# Altium PCB AX301_AX4010.PcbDoc (part 10 of 10)
Units mm, origin at the board's own origin, x right, y up, seen from the top; angles counter-clockwise.
Board outline 131.7 x 91.8 mm, 4 copper layers (Top Layer, GND, Mid-Layer 1, Bottom Layer); 191 components, 338 nets, 1108 pads, 420 vias.
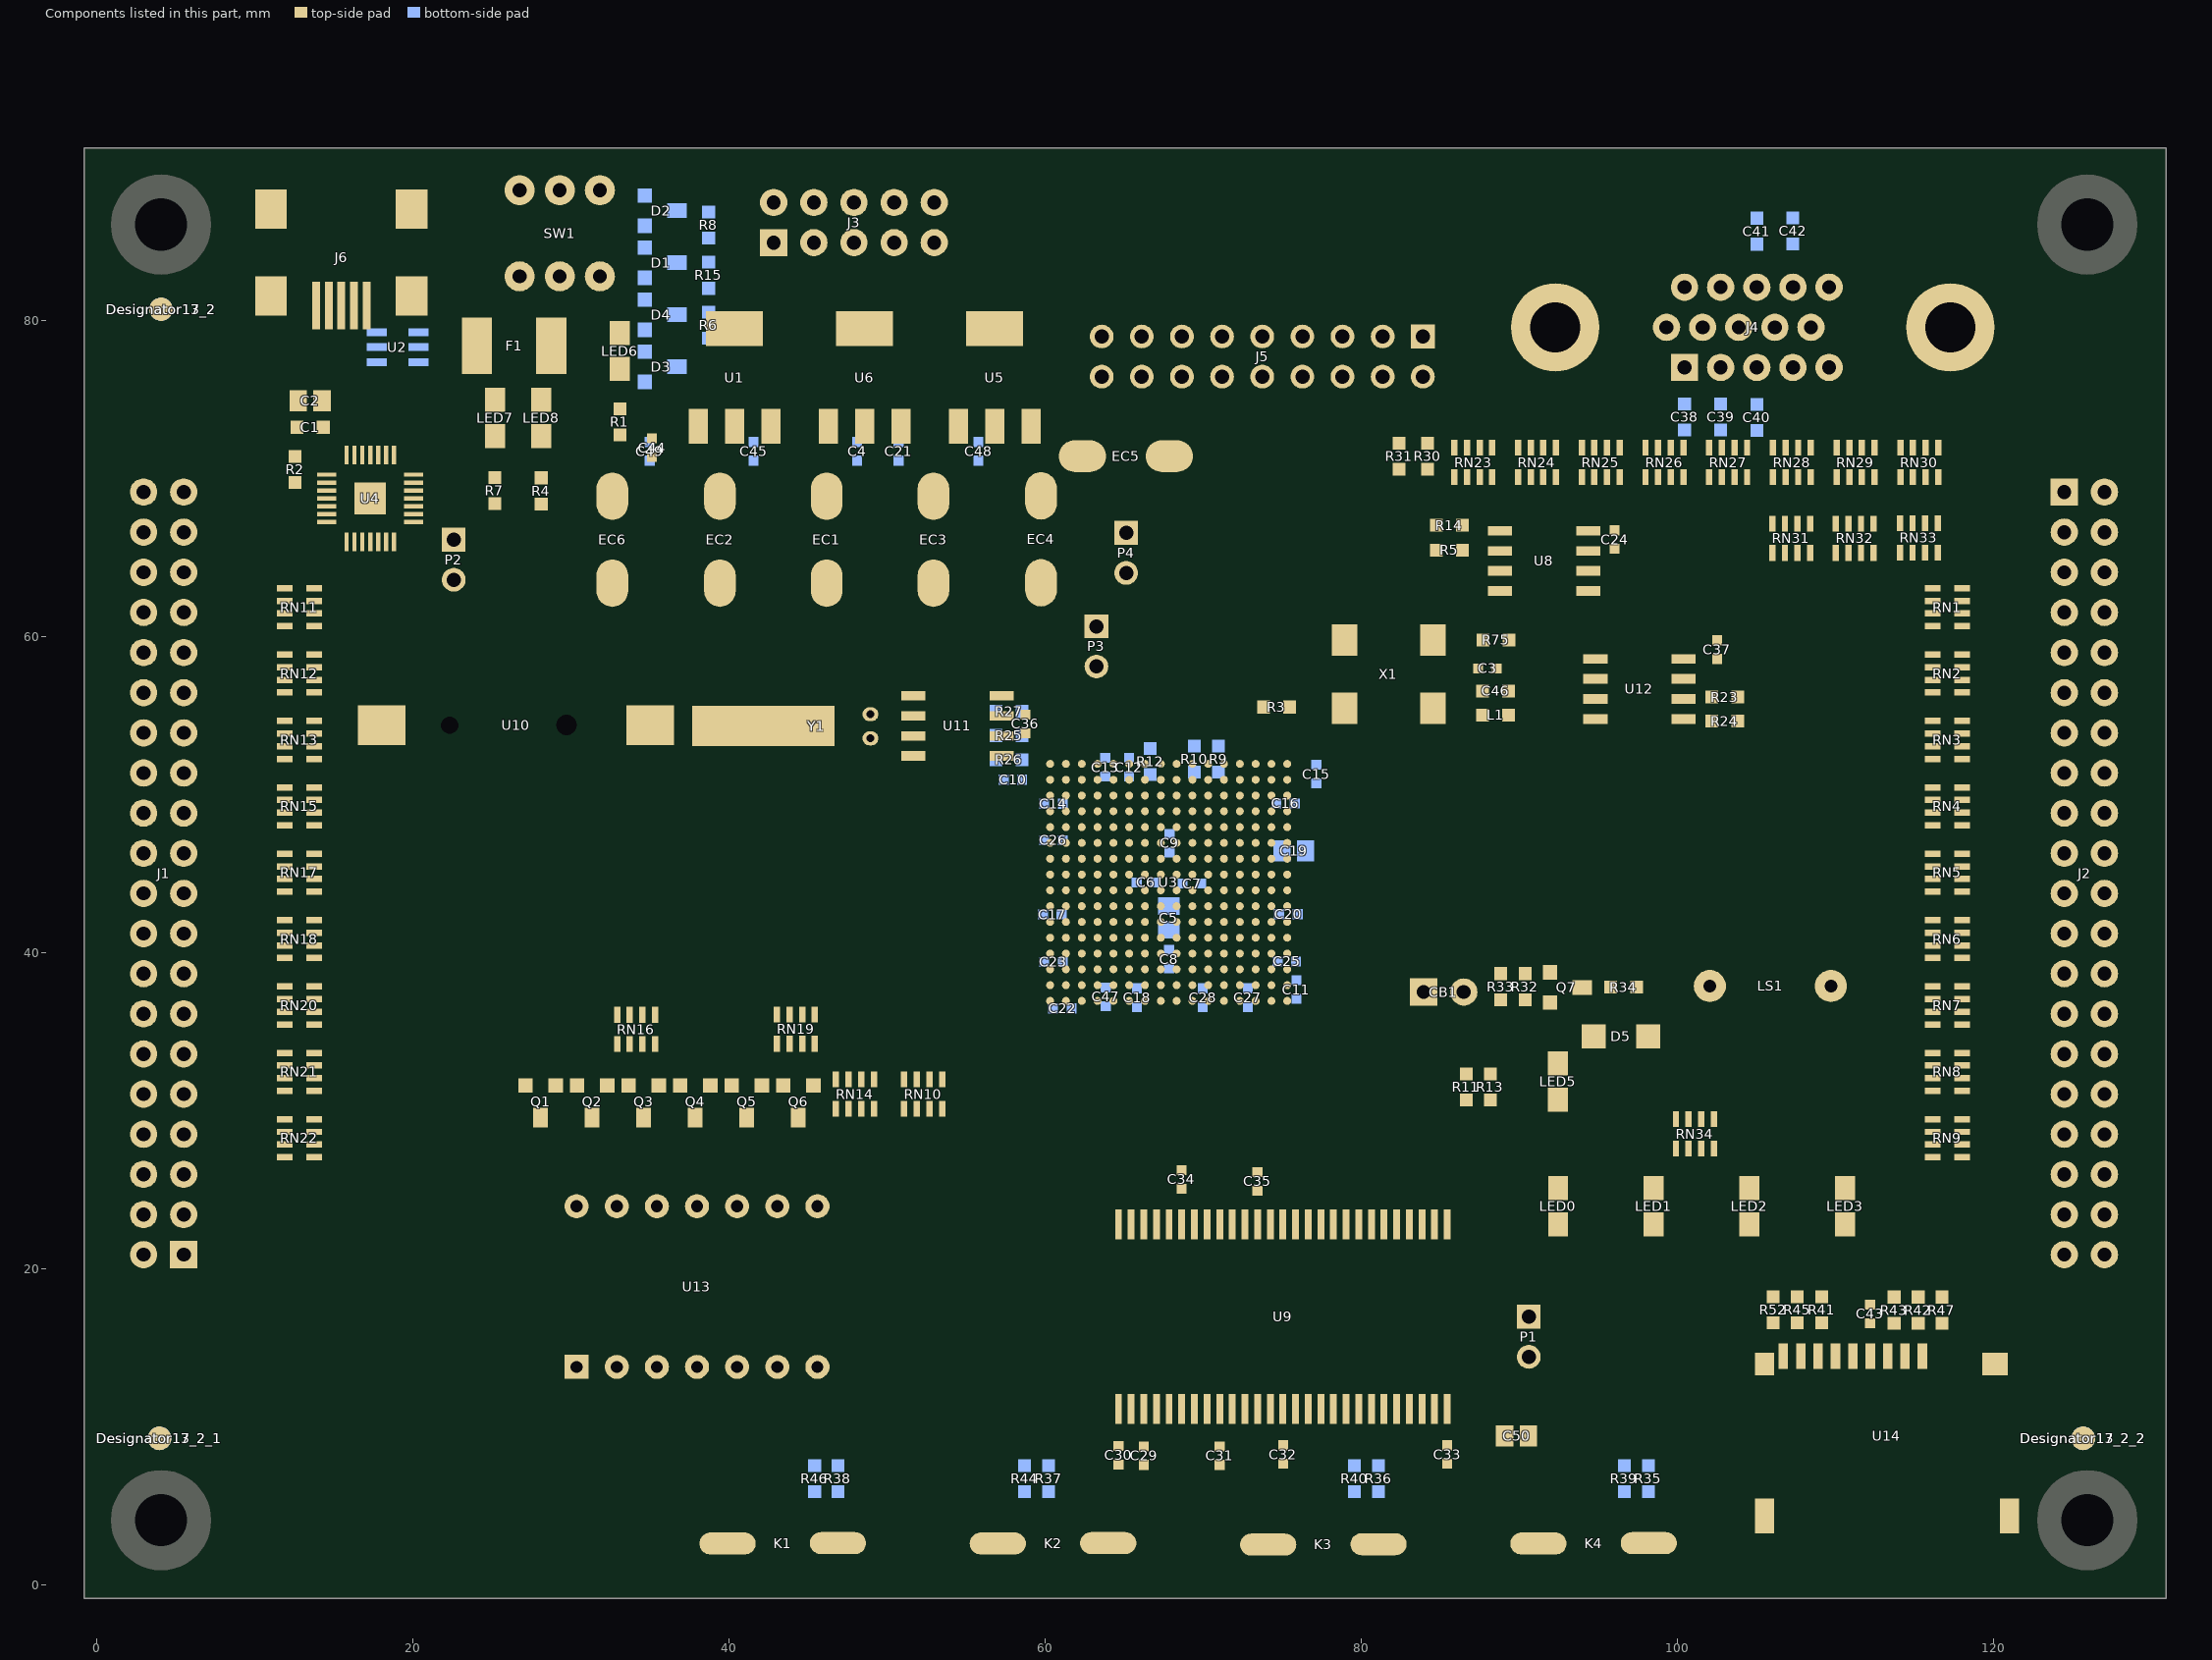
[diagram p12: the components of this part, seen from the top]

## Via types
v1: diameter 0.508, hole 0.254, Top Layer to Bottom Layer, 377 vias
v2: diameter 0.762, hole 0.381, Top Layer to Bottom Layer, 41 vias
v3: diameter 1.016, hole 0.508, Top Layer to Bottom Layer, 2 vias

## Nets (pads, with @x,y where several pads share a name; then routed paths per layer and width w, separated by ;. In a path a pad name is that pad's centre, name@x,y a point inside that pad or via, vN(x,y) a via of type N, cw(c..) or ccw(c..) an arc to the next point about the centre after c; other vN are vias at no path point) (continued)
copper on no net: (continued)
  Top Layer w0.017: 26.468,2.252 28.026,2.252 ; 26.485,2.268 28.042,2.268 ; 26.485,2.285 28.059,2.285 ; 26.485,2.301 28.075,2.301 ; 26.485,2.318 28.075,2.318 ; 26.485,2.334 28.092,2.334 ; 26.501,2.351 28.108,2.351 ; 26.501,2.367 28.125,2.367 ; 26.501,2.384 28.141,2.384 ; 26.501,2.4 28.158,2.4 ; 26.501,2.417 28.174,2.417 ; 26.518,2.433 28.191,2.433 ; 26.518,2.45 28.207,2.45 ; 26.518,2.466 28.224,2.466 ; 26.518,2.483 28.24,2.483 ; 26.534,2.499 28.257,2.499 ; 26.534,2.516 28.257,2.516 ; 26.534,2.532 28.273,2.532 ; 26.534,2.549 28.29,2.549 ; 26.534,2.565 28.306,2.565 ; 26.551,2.582 28.323,2.582 ; 26.551,2.598 28.339,2.598 ; 26.551,2.615 28.356,2.615 ; 26.551,2.631 28.372,2.631 ; 26.567,2.648 28.389,2.648 ; 26.567,2.664 28.405,2.664 ; 26.567,2.681 28.422,2.681 ; 26.567,2.697 28.422,2.697 ; 26.567,2.714 28.438,2.714 ; 26.584,2.73 28.455,2.73 ; 26.584,2.747 28.471,2.747 ; 26.584,2.764 28.488,2.764 ; 26.584,2.78 28.504,2.78 ; 26.584,2.797 28.521,2.797 ; 26.6,2.813 28.537,2.813 ; 26.6,2.83 28.554,2.83 ; 26.6,2.846 28.57,2.846 ; 26.6,2.863 28.587,2.863 ; 26.617,2.879 28.603,2.879 ; 26.617,2.896 28.603,2.896 ; 26.617,2.912 28.62,2.912 ; 26.617,2.929 28.636,2.929 ; 26.617,2.945 28.653,2.945 ; 26.633,2.962 28.669,2.962 ; 26.633,2.978 28.686,2.978 ; 26.633,2.995 28.702,2.995 ; 26.633,3.011 28.719,3.011 ; 26.633,3.028 28.735,3.028 ; 26.65,3.044 28.752,3.044 ; 26.65,3.061 28.768,3.061 ; 26.65,3.077 28.785,3.077 ; 26.65,3.094 28.785,3.094 ; 26.666,3.11 28.801,3.11 ; 26.666,3.127 28.818,3.127 ; 26.666,3.143 28.835,3.143 ; 26.666,3.16 28.851,3.16 ; 26.666,3.176 28.868,3.176 ; 26.683,3.193 28.884,3.193 ; 26.683,3.209 28.901,3.209 ; 26.683,3.226 28.917,3.226 ; 26.683,3.242 28.934,3.242 ; 26.683,3.259 28.95,3.259 ; 26.699,3.275 28.95,3.275 ; 26.699,3.292 28.967,3.292 ; 26.699,3.308 28.983,3.308 ; 26.699,3.325 29,3.325 ; 26.716,3.341 29.016,3.341 ; 26.716,3.358 29.033,3.358 ; 26.716,3.374 29.049,3.374 ; 26.716,3.391 29.066,3.391 ; 26.716,3.407 29.082,3.407 ; 26.732,3.424 29.099,3.424 ; 26.732,3.44 29.115,3.44 ; 26.732,3.457 29.132,3.457 ; 26.732,3.473 29.132,3.473 ; 26.732,3.49 29.148,3.49 ; 26.749,3.506 29.165,3.506 ; 26.749,3.523 29.181,3.523 ; 26.749,3.539 29.198,3.539 ; 26.749,3.556 29.214,3.556 ; 26.765,3.573 29.231,3.573 ; 26.765,3.589 29.247,3.589 ; 26.765,3.606 29.264,3.606 ; 26.765,3.622 29.28,3.622 ; 26.765,3.639 29.264,3.639 ; 26.782,3.655 29.264,3.655 ; 26.782,3.672 29.247,3.672 ; 26.782,3.688 29.231,3.688 ; 26.782,3.705 29.231,3.705 ; 26.782,3.721 29.214,3.721 ; 26.798,3.738 29.214,3.738 ; 26.798,3.754 29.198,3.754 ; 26.798,3.771 29.198,3.771 ; 26.798,3.787 29.181,3.787 ; 26.815,3.804 29.165,3.804 ; 26.815,3.82 29.165,3.82 ; 26.815,3.837 29.148,3.837 ; 26.815,3.853 29.148,3.853 ; 26.815,3.87 29.132,3.87 ; 26.831,3.886 29.132,3.886 ; 26.831,3.903 29.115,3.903 ; 26.831,3.919 29.115,3.919 ; 26.831,3.936 29.099,3.936 ; 26.848,3.952 29.082,3.952 ; 26.848,3.969 29.082,3.969 ; 26.848,3.985 29.066,3.985 ; 26.848,4.002 29.066,4.002 ; 26.848,4.018 29.049,4.018 ; 26.864,4.035 29.049,4.035 ; 26.864,4.051 29.033,4.051 ; 26.864,4.068 29.016,4.068 ; 26.864,4.084 29.016,4.084 ; 26.864,4.101 29,4.101 ; 26.881,4.117 29,4.117 ; 26.881,4.134 28.983,4.134 ; 26.881,4.15 28.983,4.15 ; 26.881,4.167 28.967,4.167 ; 26.897,4.183 28.95,4.183 ; 26.897,4.2 28.95,4.2 ; 26.897,4.216 28.934,4.216 ; 26.897,4.233 28.934,4.233 ; 26.897,4.249 28.917,4.249 ; 26.914,4.266 28.917,4.266 ; 26.914,4.282 28.901,4.282 ; 26.914,4.299 28.884,4.299 ; 26.914,4.315 28.884,4.315 ; 26.914,4.332 28.868,4.332 ; 26.93,4.348 28.868,4.348 ; 26.93,4.365 28.851,4.365 ; 26.93,4.381 28.851,4.381 ; 26.93,4.398 28.835,4.398 ; 26.947,4.415 28.818,4.415 ; 26.947,4.431 28.818,4.431 ; 26.947,4.448 28.801,4.448 ; 26.947,4.464 28.801,4.464 ; 26.947,4.481 28.785,4.481 ; 26.963,4.497 28.785,4.497 ; 26.963,4.514 28.768,4.514 ; 26.963,4.53 28.752,4.53 ; 26.963,4.547 28.752,4.547 ; 26.963,4.563 28.735,4.563 ; 26.98,4.58 28.735,4.58 ; 26.98,4.596 28.719,4.596 ; 26.98,4.613 28.719,4.613 ; 26.98,4.629 28.702,4.629 ; 26.996,4.646 28.702,4.646 ; 26.996,4.662 28.686,4.662 ; 26.996,4.679 28.669,4.679 ; 26.996,4.695 28.669,4.695 ; 26.996,4.712 28.653,4.712 ; 27.013,4.728 28.653,4.728 ; 27.013,4.745 28.636,4.745 ; 27.013,4.761 28.636,4.761 ; 27.013,4.778 28.62,4.778 ; 27.013,4.794 28.603,4.794 ; 27.029,4.811 28.603,4.811 ; 27.029,4.827 28.587,4.827 ; 27.029,4.844 28.587,4.844 ; 27.029,4.86 28.57,4.86 ; 27.046,4.877 28.57,4.877 ; 27.046,4.893 28.554,4.893 ; 27.046,4.91 28.537,4.91 ; 27.046,4.926 28.537,4.926 ; 27.046,4.943 28.521,4.943 ; 27.062,4.959 28.521,4.959 ; 27.062,4.976 28.504,4.976 ; 27.062,4.992 28.504,4.992 ; 27.062,5.009 28.488,5.009 ; 27.062,5.025 28.471,5.025 ; 27.079,5.042 28.471,5.042 ; 27.079,5.058 28.455,5.058 ; 27.079,5.075 28.455,5.075 ; 27.079,5.091 28.438,5.091 ; 27.095,5.108 28.438,5.108 ; 27.095,5.124 28.422,5.124 ; 27.095,5.141 28.405,5.141 ; 27.095,5.157 28.405,5.157 ; 27.095,5.174 28.389,5.174 ; 27.112,5.19 28.389,5.19 ; 27.112,5.207 28.372,5.207 ; 27.112,5.224 28.372,5.224 ; 27.112,5.24 28.356,5.24 ; 27.128,5.257 28.356,5.257 ; 27.128,5.273 28.339,5.273 ; 27.128,5.29 28.323,5.29 ; 27.128,5.306 28.323,5.306 ; 27.128,5.323 28.306,5.323 ; 27.145,5.339 28.306,5.339 ; 27.145,5.356 28.29,5.356 ; 27.145,5.372 28.29,5.372 ; 27.145,5.389 28.273,5.389 ; 27.145,5.405 28.257,5.405 ; 27.161,5.422 28.257,5.422 ; 27.161,5.438 28.24,5.438 ; 27.161,5.455 28.24,5.455 ; 27.161,5.471 28.224,5.471 ; 27.178,5.488 28.224,5.488 ; 27.178,5.504 28.207,5.504 ; 27.178,5.521 28.191,5.521 ; 27.178,5.537 28.191,5.537 ; 27.178,5.554 28.174,5.554 ; 27.195,5.57 28.174,5.57 ; 27.195,5.587 28.158,5.587 ; 27.195,5.603 28.158,5.603 ; 27.195,5.62 28.141,5.62 ; 27.195,5.636 28.125,5.636 ; 27.211,5.653 28.125,5.653 ; 27.211,5.669 28.108,5.669 ; 28.846,1.294 30.882,1.294 ; 28.846,1.311 30.865,1.311 ; 28.862,1.327 30.865,1.327 ; 28.879,1.344 30.849,1.344 ; 28.895,1.36 30.849,1.36 ; 28.912,1.377 30.832,1.377 ; 28.928,1.393 30.816,1.393 ; 28.945,1.41 30.816,1.41 ; 28.945,1.426 30.799,1.426 ; 28.961,1.443 30.799,1.443 ; 28.978,1.459 30.783,1.459 ; 28.994,1.476 30.783,1.476 ; 29.011,1.492 30.766,1.492 ; 29.027,1.509 30.766,1.509 ; 29.044,1.525 30.75,1.525 ; 29.044,1.542 30.75,1.542 ; 29.06,1.558 30.733,1.558 ; 29.077,1.575 30.733,1.575 ; 29.093,1.591 30.717,1.591 ; 29.11,1.608 30.717,1.608 ; 29.126,1.624 30.7,1.624 ; 29.143,1.641 30.7,1.641 ; 29.143,1.657 30.684,1.657 ; 29.159,1.674 30.684,1.674 ; 29.176,1.69 30.667,1.69 ; 29.192,1.707 30.667,1.707 ; 29.209,1.723 30.651,1.723 ; 29.225,1.74 30.651,1.74 ; 29.242,1.756 30.634,1.756 ; 29.242,1.773 30.634,1.773 ; 29.258,1.789 30.618,1.789 ; 29.275,1.806 30.601,1.806 ; 29.291,1.822 30.601,1.822 ; 29.308,1.839 30.585,1.839 ; 29.324,1.855 30.585,1.855 ; 29.324,3.589 29.66,3.589 ; 29.324,3.606 29.66,3.606 ; 29.324,3.622 29.66,3.622 ; 29.341,1.872 30.568,1.872 ; 29.341,1.888 30.568,1.888 ; 29.341,3.556 29.677,3.556 ; 29.341,3.573 29.677,3.573 ; 29.341,3.639 29.677,3.639 ; 29.357,1.905 30.552,1.905 ; 29.357,3.523 29.693,3.523 ; 29.357,3.539 29.693,3.539 ; 29.357,3.655 29.693,3.655 ; 29.374,1.922 30.552,1.922 ; 29.374,3.49 29.726,3.49 ; 29.374,3.506 29.71,3.506 ; 29.374,3.672 29.71,3.672 ; 29.39,1.938 30.535,1.938 ; 29.39,3.457 29.743,3.457 ; 29.39,3.473 29.726,3.473 ; 29.39,3.688 29.726,3.688 ; 29.407,1.955 30.535,1.955 ; 29.407,3.424 29.759,3.424 ; 29.407,3.44 29.743,3.44 ; 29.407,3.705 29.743,3.705 ; 29.423,1.971 30.519,1.971 ; 29.423,3.391 29.776,3.391 ; 29.423,3.407 29.759,3.407 ; 29.423,3.721 29.759,3.721 ; 29.44,1.988 30.519,1.988 ; 29.44,2.004 30.502,2.004 ; 29.44,3.374 29.776,3.374 ; 29.44,3.738 29.776,3.738 ; 29.456,2.021 30.502,2.021 ; 29.456,3.341 29.792,3.341 ; 29.456,3.358 29.792,3.358 ; 29.456,3.754 29.792,3.754 ; 29.473,2.037 30.486,2.037 ; 29.473,3.308 29.809,3.308 ; 29.473,3.325 29.809,3.325 ; 29.473,3.771 29.809,3.771 ; 29.489,2.054 30.486,2.054 ; 29.489,3.275 29.825,3.275 ; 29.489,3.292 29.825,3.292 ; 29.489,3.787 29.825,3.787 ; 29.506,2.07 30.469,2.07 ; 29.506,3.242 29.842,3.242 ; 29.506,3.259 29.842,3.259 ; 29.506,3.804 29.842,3.804 ; 29.522,2.087 30.469,2.087 ; 29.522,3.209 29.858,3.209 ; 29.522,3.226 29.858,3.226 ; 29.522,3.82 29.858,3.82 ; 29.539,2.103 30.452,2.103 ; 29.539,2.12 30.452,2.12 ; 29.539,3.176 29.891,3.176 ; 29.539,3.193 29.875,3.193 ; 29.539,3.837 29.875,3.837 ; 29.555,2.136 30.436,2.136 ; 29.555,3.143 29.908,3.143 ; 29.555,3.16 29.891,3.16 ; 29.555,3.853 29.891,3.853 ; 29.555,5.653 31.559,5.653 ; 29.555,5.669 31.575,5.669 ; 29.572,2.153 30.436,2.153 ; 29.572,3.11 29.924,3.11 ; 29.572,3.127 29.908,3.127 ; 29.572,3.87 29.908,3.87 ; 29.572,5.62 31.526,5.62 ; 29.572,5.636 31.542,5.636 ; 29.588,2.169 30.419,2.169 ; 29.588,3.077 29.941,3.077 ; 29.588,3.094 29.924,3.094 ; 29.588,3.886 29.924,3.886 ; 29.588,5.587 31.493,5.587 ; 29.588,5.603 31.509,5.603 ; 29.605,2.186 30.419,2.186 ; 29.605,3.061 29.941,3.061 ; 29.605,3.903 29.941,3.903 ; 29.605,5.554 31.476,5.554 ; 29.605,5.57 31.476,5.57 ; 29.621,2.202 30.403,2.202 ; 29.621,3.028 29.957,3.028 ; 29.621,3.044 29.957,3.044 ; 29.621,3.919 29.957,3.919 ; 29.621,5.521 31.443,5.521 ; 29.621,5.537 31.46,5.537 ; 29.638,2.219 30.386,2.219 ; 29.638,2.235 30.386,2.235 ; 29.638,2.995 29.974,2.995 ; 29.638,3.011 29.974,3.011 ; 29.638,3.936 29.974,3.936 ; 29.638,5.488 31.41,5.488 ; 29.638,5.504 31.427,5.504 ; 29.654,2.252 30.37,2.252 ; 29.654,2.962 29.99,2.962 ; 29.654,2.978 29.99,2.978 ; 29.654,3.952 29.99,3.952 ; 29.654,5.455 31.377,5.455 ; 29.654,5.471 31.394,5.471 ; 29.671,2.268 30.37,2.268 ; 29.671,2.929 30.007,2.929 ; 29.671,2.945 30.007,2.945 ; 29.671,3.969 30.007,3.969 ; 29.671,5.422 31.361,5.422 ; 29.671,5.438 31.361,5.438 ; 29.688,2.285 30.353,2.285 ; 29.688,2.896 30.023,2.896 ; 29.688,2.912 30.023,2.912 ; 29.688,3.985 30.023,3.985 ; 29.688,5.389 31.328,5.389 ; 29.688,5.405 31.344,5.405 ; 29.704,2.301 30.353,2.301 ; 29.704,2.863 30.056,2.863 ; 29.704,2.879 30.04,2.879 ; 29.704,4.002 30.04,4.002 ; 29.704,5.356 31.294,5.356 ; 29.704,5.372 31.311,5.372 ; 29.721,2.318 30.337,2.318 ; 29.721,2.83 30.073,2.83 ; 29.721,2.846 30.056,2.846 ; 29.721,4.018 30.056,4.018 ; 29.721,5.323 31.261,5.323 ; 29.721,5.339 31.278,5.339 ; 29.737,2.334 30.337,2.334 ; 29.737,2.351 30.32,2.351 ; 29.737,2.797 30.089,2.797 ; 29.737,2.813 30.073,2.813 ; 29.737,4.035 30.073,4.035 ; 29.737,5.29 31.245,5.29 ; 29.737,5.306 31.245,5.306 ; 29.754,2.367 30.32,2.367 ; 29.754,2.764 30.106,2.764 ; 29.754,2.78 30.089,2.78 ; 29.754,4.051 30.089,4.051 ; 29.754,5.257 31.212,5.257 ; 29.754,5.273 31.228,5.273 ; 29.77,2.384 30.304,2.384 ; 29.77,2.747 30.106,2.747 ; 29.77,4.068 30.106,4.068 ; 29.77,5.224 31.179,5.224 ; 29.77,5.24 31.195,5.24 ; 29.787,2.4 30.304,2.4 ; 29.787,2.714 30.122,2.714 ; 29.787,2.73 30.122,2.73 ; 29.787,4.084 30.122,4.084 ; 29.787,5.207 31.162,5.207 ; 29.803,2.417 30.287,2.417 ; 29.803,2.681 30.139,2.681 ; 29.803,2.697 30.139,2.697 ; 29.803,4.101 30.139,4.101 ; 29.803,5.174 31.129,5.174 ; 29.803,5.19 31.146,5.19 ; 29.82,2.433 30.287,2.433 ; 29.82,2.648 30.155,2.648 ; 29.82,2.664 30.155,2.664 ; 29.82,4.117 30.155,4.117 ; 29.82,5.141 31.113,5.141 ; 29.82,5.157 31.113,5.157 ; 29.836,2.45 30.271,2.45 ; 29.836,2.466 30.271,2.466 ; 29.836,2.615 30.172,2.615 ; 29.836,2.631 30.172,2.631 ; 29.836,4.134 30.172,4.134 ; 29.836,5.108 31.08,5.108 ; 29.836,5.124 31.096,5.124 ; 29.853,2.483 30.254,2.483 ; 29.853,2.582 30.205,2.582 ; 29.853,2.598 30.188,2.598 ; 29.853,4.15 30.188,4.15 ; 29.853,5.075 31.047,5.075 ; 29.853,5.091 31.063,5.091 ; 29.869,2.499 30.254,2.499 ; 29.869,2.549 30.221,2.549 ; 29.869,2.565 30.205,2.565 ; 29.869,4.167 30.205,4.167 ; 29.869,5.042 31.014,5.042 ; 29.869,5.058 31.03,5.058 ; 29.886,2.516 30.221,2.516 ; 29.886,2.532 30.221,2.532 ; 29.886,4.183 30.221,4.183 ; 29.886,5.009 30.997,5.009 ; 29.886,5.025 30.997,5.025 ; 29.902,4.2 30.238,4.2 ; 29.902,4.976 30.964,4.976 ; 29.902,4.992 30.981,4.992 ; 29.919,4.216 30.254,4.216 ; 29.919,4.943 30.931,4.943 ; 29.919,4.959 30.948,4.959 ; 29.935,4.233 30.271,4.233 ; 29.935,4.91 30.898,4.91 ; 29.935,4.926 30.915,4.926 ; 29.952,4.249 30.287,4.249 ; 29.952,4.877 30.882,4.877 ; 29.952,4.893 30.882,4.893 ; 29.968,4.266 30.304,4.266 ; 29.968,4.844 30.849,4.844 ; 29.968,4.86 30.865,4.86 ; 29.985,4.282 30.32,4.282 ; 29.985,4.811 30.816,4.811 ; 29.985,4.827 30.832,4.827 ; 30.001,4.299 30.337,4.299 ; 30.001,4.778 30.783,4.778 ; 30.001,4.794 30.799,4.794 ; 30.018,4.315 30.37,4.315 ; 30.018,4.745 30.75,4.745 ; 30.018,4.761 30.766,4.761 ; 30.034,4.332 30.386,4.332 ; 30.034,4.728 30.75,4.728 ; 30.051,4.348 30.403,4.348 ; 30.051,4.695 30.717,4.695 ; 30.051,4.712 30.733,4.712 ; 30.067,4.365 30.419,4.365 ; 30.067,4.662 30.684,4.662 ; 30.067,4.679 30.7,4.679 ; 30.084,4.381 30.436,4.381 ; 30.084,4.629 30.651,4.629 ; 30.084,4.646 30.667,4.646 ; 30.1,4.398 30.452,4.398 ; 30.1,4.596 30.634,4.596 ; 30.1,4.613 30.634,4.613 ; 30.117,4.415 30.469,4.415 ; 30.117,4.563 30.601,4.563 ; 30.117,4.58 30.618,4.58 ; 30.133,4.431 30.486,4.431 ; 30.133,4.53 30.568,4.53 ; 30.133,4.547 30.585,4.547 ; 30.15,4.448 30.502,4.448 ; 30.15,4.497 30.535,4.497 ; 30.15,4.514 30.552,4.514 ; 30.166,4.464 30.519,4.464 ; 30.166,4.481 30.519,4.481 ; 31.157,3.407 33.854,3.407 ; 31.157,3.424 33.854,3.424 ; 31.157,3.44 33.854,3.44 ; 31.173,3.391 33.854,3.391 ; 31.173,3.457 33.854,3.457 ; 31.19,3.358 33.854,3.358 ; 31.19,3.374 33.854,3.374 ; 31.19,3.473 33.854,3.473 ; 31.206,3.325 33.854,3.325 ; 31.206,3.341 33.854,3.341 ; 31.206,3.49 33.854,3.49 ; 31.223,3.292 33.854,3.292 ; 31.223,3.308 33.854,3.308 ; 31.223,3.506 33.854,3.506 ; 31.239,3.259 33.854,3.259 ; 31.239,3.275 33.854,3.275 ; 31.239,3.523 33.854,3.523 ; 31.256,3.226 33.854,3.226 ; 31.256,3.242 33.854,3.242 ; 31.256,3.539 33.854,3.539 ; 31.272,3.193 33.854,3.193 ; 31.272,3.209 33.854,3.209 ; 31.272,3.556 33.854,3.556 ; 31.289,3.176 33.854,3.176 ; 31.289,3.573 33.854,3.573 ; 31.305,3.143 33.854,3.143 ; 31.305,3.16 33.854,3.16 ; 31.305,3.589 33.854,3.589 ; 31.322,3.11 33.854,3.11 ; 31.322,3.127 33.854,3.127 ; 31.322,3.606 33.854,3.606 ; 31.339,3.077 33.854,3.077 ; 31.339,3.094 33.854,3.094 ; 31.339,3.622 33.854,3.622 ; 31.355,3.044 33.854,3.044 ; 31.355,3.061 33.854,3.061 ; 31.355,3.639 33.854,3.639 ; 31.372,3.011 33.854,3.011 ; 31.372,3.028 33.854,3.028 ; 31.372,3.655 33.854,3.655 ; 31.372,3.672 33.854,3.672 ; 31.388,2.978 33.854,2.978 ; 31.388,2.995 33.854,2.995 ; 31.388,3.688 33.854,3.688 ; 31.405,2.945 33.854,2.945 ; 31.405,2.962 33.854,2.962 ; 31.405,3.705 33.854,3.705 ; 31.421,2.929 33.854,2.929 ; 31.421,3.721 33.854,3.721 ; 31.438,2.896 33.854,2.896 ; 31.438,2.912 33.854,2.912 ; 31.438,3.738 33.854,3.738 ; 31.454,2.863 33.854,2.863 ; 31.454,2.879 33.854,2.879 ; 31.454,3.754 33.854,3.754 ; 31.471,2.83 33.854,2.83 ; 31.471,2.846 33.854,2.846 ; 31.471,3.771 33.854,3.771 ; 31.487,2.797 33.854,2.797 ; 31.487,2.813 33.854,2.813 ; 31.487,3.787 33.854,3.787 ; 31.504,2.764 33.854,2.764 ; 31.504,2.78 33.854,2.78 ; 31.504,3.804 33.854,3.804 ; 31.52,2.73 33.854,2.73 ; 31.52,2.747 33.854,2.747 ; 31.52,3.82 33.854,3.82 ; 31.537,2.714 33.854,2.714 ; 31.537,3.837 33.854,3.837 ; 31.553,2.681 33.854,2.681 ; 31.553,2.697 33.854,2.697 ; 31.553,3.853 33.854,3.853 ; 31.57,2.648 33.854,2.648 ; 31.57,2.664 33.854,2.664 ; 31.57,3.87 33.854,3.87 ; 31.57,3.886 33.854,3.886 ; 31.586,2.615 33.854,2.615 ; 31.586,2.631 33.854,2.631 ; 31.586,3.903 33.854,3.903 ; 31.603,2.582 33.854,2.582 ; 31.603,2.598 33.854,2.598 ; 31.603,3.919 33.854,3.919 ; 31.619,2.549 33.854,2.549 ; 31.619,2.565 33.854,2.565 ; 31.619,3.936 33.854,3.936 ; 31.636,2.516 33.854,2.516 ; 31.636,2.532 33.854,2.532 ; 31.636,3.952 33.854,3.952 ; 31.652,2.499 33.854,2.499 ; 31.652,3.969 33.854,3.969 ; 31.669,2.466 33.854,2.466 ; 31.669,2.483 33.854,2.483 ; 31.669,3.985 33.854,3.985 ; 31.685,2.433 33.854,2.433 ; 31.685,2.45 33.854,2.45 ; 31.685,4.002 33.854,4.002 ; 31.702,2.4 33.854,2.4 ; 31.702,2.417 33.854,2.417 ; 31.702,4.018 33.854,4.018 ; 31.718,2.367 33.854,2.367 ; 31.718,2.384 33.854,2.384 ; 31.718,4.035 33.854,4.035 ; 31.735,2.334 33.854,2.334 ; 31.735,2.351 33.854,2.351 ; 31.735,4.051 33.854,4.051 ; 31.751,2.301 33.854,2.301 ; 31.751,2.318 33.854,2.318 ; 31.751,4.068 33.854,4.068 ; 31.768,2.268 33.854,2.268 ; 31.768,2.285 33.854,2.285 ; 31.768,4.084 33.854,4.084 ; 31.784,2.252 33.854,2.252 ; 31.784,4.101 33.854,4.101 ; 31.784,4.117 33.854,4.117 ; 31.801,2.219 33.854,2.219 ; 31.801,2.235 33.854,2.235 ; 31.801,4.134 33.854,4.134 ; 31.817,2.186 33.854,2.186 ; 31.817,2.202 33.854,2.202 ; 31.817,4.15 33.854,4.15 ; 31.834,2.153 33.854,2.153 ; 31.834,2.169 33.854,2.169 ; 31.834,4.167 33.854,4.167 ; 31.85,2.12 33.854,2.12 ; 31.85,2.136 33.854,2.136 ; 31.85,4.183 33.854,4.183 ; 31.867,2.087 33.854,2.087 ; 31.867,2.103 33.854,2.103 ; 31.867,4.2 33.854,4.2 ; 31.883,2.054 33.854,2.054 ; 31.883,2.07 33.854,2.07 ; 31.883,4.216 33.854,4.216 ; 31.9,2.037 33.854,2.037 ; 31.9,4.233 33.854,4.233 ; 31.916,2.004 33.854,2.004 ; 31.916,2.021 33.854,2.021 ; 31.916,4.249 33.854,4.249 ; 31.933,1.971 33.854,1.971 ; 31.933,1.988 33.854,1.988 ; 31.933,4.266 33.854,4.266 ; 31.949,1.938 33.854,1.938 ; 31.949,1.955 33.854,1.955 ; 31.949,4.282 33.854,4.282 ; 31.966,1.905 33.854,1.905 ; 31.966,1.922 33.854,1.922 ; 31.966,4.299 33.854,4.299 ; 31.982,1.872 33.854,1.872 ; 31.982,1.888 33.854,1.888 ; 31.982,4.315 33.854,4.315 ; 31.982,4.332 33.854,4.332 ; 31.999,1.839 33.854,1.839 ; 31.999,1.855 33.854,1.855 ; 31.999,4.348 33.854,4.348 ; 32.015,1.806 33.854,1.806 ; 32.015,1.822 33.854,1.822 ; 32.015,4.365 33.854,4.365 ; 32.032,1.789 33.854,1.789 ; 32.032,4.381 33.854,4.381 ; 32.048,1.756 33.854,1.756 ; 32.048,1.773 33.854,1.773 ; 32.048,4.398 33.854,4.398 ; 32.065,1.723 33.854,1.723 ; 32.065,1.74 33.854,1.74 ; 32.065,4.415 33.854,4.415 ; 32.081,1.69 33.854,1.69 ; 32.081,1.707 33.854,1.707 ; 32.081,4.431 33.854,4.431 ; 32.098,1.657 33.854,1.657 ; 32.098,1.674 33.854,1.674 ; 32.098,4.448 33.854,4.448 ; 32.114,1.624 33.854,1.624 ; 32.114,1.641 33.854,1.641 ; 32.114,4.464 33.854,4.464 ; 32.131,1.591 33.854,1.591 ; 32.131,1.608 33.854,1.608 ; 32.131,4.481 33.854,4.481 ; 32.148,1.575 33.854,1.575 ; 32.148,4.497 33.854,4.497 ; 32.164,1.542 33.854,1.542 ; 32.164,1.558 33.854,1.558 ; 32.164,4.514 33.854,4.514 ; 32.181,1.509 33.854,1.509 ; 32.181,1.525 33.854,1.525 ; 32.181,4.53 33.854,4.53 ; 32.197,1.476 33.854,1.476 ; 32.197,1.492 33.854,1.492 ; 32.197,4.547 33.854,4.547 ; 32.197,4.563 33.854,4.563 ; 32.214,1.443 33.854,1.443 ; 32.214,1.459 33.854,1.459 ; 32.214,4.58 33.854,4.58 ; 32.23,1.41 33.854,1.41 ; 32.23,1.426 33.854,1.426 ; 32.23,4.596 33.854,4.596 ; 32.247,1.377 33.854,1.377 ; 32.247,1.393 33.854,1.393 ; 32.247,4.613 33.854,4.613 ; 32.263,1.36 33.854,1.36 ; 32.263,4.629 33.854,4.629 ; 32.28,1.327 33.854,1.327 ; 32.28,1.344 33.854,1.344 ; 32.28,4.646 33.854,4.646 ; 32.296,1.294 33.854,1.294 ; 32.296,1.311 33.854,1.311 ; 32.296,4.662 33.854,4.662 ; 32.313,4.679 33.854,4.679 ; 32.329,4.695 33.854,4.695 ; 32.346,4.712 33.854,4.712 ; 32.362,4.728 33.854,4.728 ; 32.379,4.745 33.854,4.745 ; 32.395,4.761 33.854,4.761 ; 32.395,4.778 33.854,4.778 ; 32.412,4.794 33.854,4.794 ; 32.428,4.811 33.854,4.811 ; 32.445,4.827 33.854,4.827 ; 32.461,4.844 33.854,4.844 ; 32.478,4.86 33.854,4.86 ; 32.494,4.877 33.854,4.877 ; 32.511,4.893 33.854,4.893 ; 32.527,4.91 33.854,4.91 ; 32.544,4.926 33.854,4.926 ; 32.56,4.943 33.854,4.943 ; 32.577,4.959 33.854,4.959 ; 32.593,4.976 33.854,4.976 ; 32.593,4.992 33.854,4.992 ; 32.61,5.009 33.854,5.009 ; 32.626,5.025 33.854,5.025 ; 32.643,5.042 33.854,5.042 ; 32.659,5.058 33.854,5.058 ; 32.676,5.075 33.854,5.075 ; 32.692,5.091 33.854,5.091 ; 32.709,5.108 33.854,5.108 ; 32.725,5.124 33.854,5.124 ; 32.742,5.141 33.854,5.141 ; 32.758,5.157 33.854,5.157 ; 32.775,5.174 33.854,5.174 ; 32.791,5.19 33.854,5.19 ; 32.808,5.207 33.854,5.207 ; 32.808,5.224 33.854,5.224 ; 32.824,5.24 33.854,5.24 ; 32.841,5.257 33.854,5.257 ; 32.857,5.273 33.854,5.273 ; 32.874,5.29 33.854,5.29 ; 32.89,5.306 33.854,5.306 ; 32.907,5.323 33.854,5.323 ; 32.923,5.339 33.854,5.339 ; 32.94,5.356 33.854,5.356 ; 32.956,5.372 33.854,5.372 ; 32.973,5.389 33.854,5.389 ; 32.99,5.405 33.854,5.405 ; 33.006,5.422 33.854,5.422 ; 33.006,5.438 33.854,5.438 ; 33.023,5.455 33.854,5.455 ; 33.039,5.471 33.854,5.471 ; 33.056,5.488 33.854,5.488 ; 33.072,5.504 33.854,5.504 ; 33.089,5.521 33.854,5.521 ; 33.105,5.537 33.854,5.537 ; 33.122,5.554 33.854,5.554 ; 33.138,5.57 33.854,5.57 ; 33.155,5.587 33.854,5.587 ; 33.171,5.603 33.854,5.603 ; 33.188,5.62 33.854,5.62 ; 33.204,5.636 33.854,5.636 ; 33.221,5.653 33.854,5.653 ; 33.221,5.669 33.854,5.669

## Polygon pours and split planes (outlines as drawn)
D1V2 on Bottom Layer "Bottom Layer-No Net" (solid, pour order 7): 62.312,49.962 73.33,49.962 73.33,48.603 73.33,38.887 62.205,38.887 62.312,38.887 62.312,49.962
GND on Bottom Layer "Bottom Layer-No Net" (hatched 45Degree grid 0.508 track 0.127, remove dead copper, pour order 4): -0.787,91.034 130.785,91.034 130.785,-0.66 131.191,-1.067 -0.787,-1.067 -0.787,91.034 -0.889,91.135
GND on GND (split plane): 130.401,82.354 130.401,-0.371 -0.277,-0.371 -0.277,90.404 130.401,90.404
D2V5 on GND (split plane): 49.287,45.872 49.292,45.848 49.306,45.827 49.327,45.813 49.352,45.808 64.338,45.808 64.363,45.813 64.384,45.827 64.398,45.848 64.403,45.872 64.403,48.83 66.229,48.83 66.229,41.91 66.234,41.885 66.248,41.864 66.269,41.85 66.294,41.845 71.233,41.845 71.233,39.984 64.403,39.984 64.403,42.977 64.398,43.002 64.384,43.023 64.363,43.037 64.338,43.042 46.902,43.042 46.902,70.471 49.287,70.471

## Keep-outs
Keep-Out Layer:
  lines w0.203: 0,3.074 0,86.926 cw(c3.066,86.926) 3.066,89.992 ; 0.007,3.074 ccw(c3.073,3.074) 3.073,0.008 ; 2.972,0 126.931,0 ccw(c126.931,3.066) 129.997,3.066 ; 3.074,90 126.931,90 ; 126.931,89.992 cw(c126.931,86.926) 129.997,86.926 ; 130,2.979 130,86.926

## Other copper
Top Layer:
  rectangle net D3V3: 93.574,65.126 95.148,68.478
  rectangle net GND: 88.011,61.773 89.535,63.17
  rectangle net D3V3: 60.858,71.247 63.856,74.32
  rectangle net D3V3: 58.496,71.171 63.856,74.397
  rectangle net D1V2: 56.185,67.132 60.833,70.51
  rectangle net D1V2: 56.185,67.132 57.607,79.451
  rectangle net VCC: 50.292,67.259 54.051,70.46
  rectangle net VCC: 50.216,67.285 51.511,74.422
  rectangle net D2V5: 45.11,67.31 48.641,70.46
  rectangle net D2V5: 47.752,67.285 49.225,79.019
  rectangle net VCC: 38.405,67.259 43.282,70.383
  rectangle net VCC: 42.037,67.564 43.282,74.371
  rectangle net D3V3: 31.547,67.259 37.338,71.73
  rectangle net D3V3: 36.322,70.815 40.97,71.73
  rectangle net VCC: 13.945,70.079 15.164,72.136
  rectangle net GND: 16.535,53.137 19.507,57.81
  rectangle net VCC: 13.995,70.891 15.926,72.136
  rectangle net GND: 119.304,11.125 120.929,14.63
  rectangle net GND: 120.421,3.226 121.615,7.899
  rectangle net GND: 104.902,3.302 106.147,7.874
  rectangle net GND: 34.696,72.212 38.659,74.397
  rectangle net D3V3: 39.751,71.018 40.97,79.832
  rectangle net VBUS: 16.815,77.622 24.968,79.146
  rectangle net NetF1_2: 28.219,76.606 30.378,89.256
  rectangle net GND: 12.243,77.445 14.122,82.423
  rectangle net VBUS: 16.815,77.876 18.618,82.448
  rectangle net NetC3_1: 83.718,54.432 87.732,57.76
  rectangle net VCC: 50.952,67.259 52.73,83.21
  rectangle net VCC: 42.672,67.259 44.044,83.21
  rectangle net GND: 77.165,58.75 79.731,60.706
  rectangle net GND: 58.598,61.874 63.043,65.151
  rectangle net GND: 61.544,59.868 64.033,62.484
  rectangle net GND: 43.663,61.798 47.32,64.973
  rectangle net GND: 31.572,61.824 34.798,65.049
  rectangle net GND: 38.303,61.798 41.732,64.973
  rectangle net GND: 50.038,61.824 53.924,65.024
  rectangle net GND: 66.269,70.333 69.393,73.66
  rectangle net D3V3: 59.284,71.857 62.205,82.017
  rectangle net D3V3: 22.047,29.21 26.137,32.69
  rectangle net GND: 45.669,70.968 46.888,72.542
  rectangle net GND: 53.111,70.942 55.143,76.632
Mid-Layer 1:
  rectangle net D3V3: 11.1,67.208 35.814,70.129
  rectangle net D3V3: 55.143,61.265 56.667,80.772
  rectangle net D2V5: 45.085,75.387 49.098,77.775
  rectangle net D2V5: 47.371,67.208 49.149,77.622
  rectangle net D3V3: 32.893,78.181 58.649,81.661
  rectangle net D3V3: 32.893,67.208 35.814,80.975
  rectangle net D3V3: 2.057,67.945 35.687,70.155
  rectangle net VCC: 40.665,67.285 42.393,70.333
  rectangle net D3V3: 54.585,78.207 61.951,81.661
  rectangle net D3V3: 8.636,29.896 11.582,69.875
  rectangle net D3V3: 8.636,29.185 57.277,32.664
Bottom Layer:
  rectangle net GND: 59.303,48.36 60.452,50.038
  rectangle net GND: 52.807,75.794 54.661,76.835
  rectangle net GND: 40.919,71.666 42.189,72.93
  rectangle net GND: 35.611,71.933 37.008,74.676
  rectangle net D3V3: 53.696,55.982 56.718,65.634
  rectangle net GND: 53.416,70.968 55.016,72.415
  rectangle net GND: 45.695,70.968 46.863,72.263
  rectangle net D2V5: 40.843,75.997 47.396,77.749
  rectangle net GND: 97.993,78.352 104.893,80.67
  rectangle net D1V2: 69.266,41.813 70.333,46.914
  rectangle net D1V2: 70.287,43.699 70.447,44.882
  rectangle net D1V2: 72.295,38.913 73.33,39.926
  rectangle net D1V2: 73.203,39.802 73.33,40.453
  rectangle net D1V2: 72.734,39.926 73.203,40.03
  rectangle net D1V2: 73.201,41.397 73.33,43.453
  rectangle net D1V2: 65.253,45.822 66.382,46.99
  rectangle net D1V2: 62.255,48.92 63.348,49.987
  rectangle net D1V2: 51.46,67.234 58.547,70.485
  rectangle net D1V2: 51.46,44.196 53.238,70.536
  rectangle net GND: 66.548,42.113 69.139,46.685
  rectangle net D1V2: 67.208,46.812 70.358,48.031
  rectangle net D1V2: 66.548,40.818 69.393,41.976
  rectangle net D1V2: 70.196,44.882 70.447,44.92
  rectangle net D1V2: 67.297,47.926 68.44,48.069
  rectangle net D1V2: 51.46,43.84 66.411,45.034
  rectangle net D1V2: 67.234,39.649 68.428,41.224
  rectangle net D1V2: 66.218,45.034 66.411,46.685
  rectangle net D1V2: 71.669,38.913 72.295,39.039
  rectangle net D2V5: 47.168,67.285 49.2,71.45
  rectangle net VCC: 40.843,67.259 42.189,71.476
  rectangle net D3V3: 34.138,67.259 35.839,71.425
  rectangle net VCC: 50.343,67.259 51.232,71.45
  rectangle net D3V3: 54.915,29.235 68.351,32.664
  rectangle net D3V3: 66.7,29.337 68.377,37.846
  rectangle net GND: 11.862,77.089 14.503,79.756
  rectangle net GND: 68.758,35.398 70.612,37.109
GND (plane layer: these items are gaps in the copper):
  lines w0.127: 46.838,42.977 46.838,70.536 49.352,70.536 49.352,45.872 64.338,45.872 64.338,48.895 66.294,48.895 66.294,41.91 69.342,41.91 71.298,41.91 71.298,39.919 70.358,39.919 69.291,39.919 64.338,39.919 64.338,42.977 46.838,42.977

## Silkscreen, mask and mechanical layers (free items; w line width, h text height)
Top Overlay:
  drawing of 2922 lines, arcs and shapes, not listed
  text "PWR" at 22.733,85.395 h2.03 r90
  text "VGA" at 88.443,85.369 h2.03 r90
  text "JTAG" at 60.147,84.684 h2.03 r90
  text "【39】" at 4.902,79.045 h2.03 r270
  text "【40】" at 2.032,79.019 h2.03 r270
  text "PWR" at 31.547,76.683 h1.52 r90
  text "【1】" at 125.07,75.286 h2.03 r90
  text "【2】" at 127.787,75.286 h2.03 r90
  text "CAMERA" at 70.079,72.822 h2.03
  text "GND" at 67.183,65.989 h1.52
  text "GND" at 24.765,65.659 h1.52
  text "IO: 3.3V" at 121.133,65.38 h2.54 r90
  text "1.2V" at 67.208,63.348 h1.52
  text "5V" at 25.375,62.814 h1.52
  text "GND" at 65.278,60.198 h1.52
  text "2.5V" at 65.38,57.607 h1.52
  text "IO: 3.3V" at 8.941,23.978 h2.54 r270
  text "GND" at 92.634,16.51 h1.52
  text "【2】" at 2.362,14.554 h2.03 r270
  text "【1】" at 4.902,14.554 h2.03 r270
  text "3.3V" at 92.71,13.843 h1.52
  text "【39】" at 125.07,11.125 h2.03 r90
  text "【40】" at 127.94,11.049 h2.03 r90
Bottom Overlay:
  lines w0.203: 7.661,39.81 16.764,39.81 ; 7.671,27.11 16.764,27.11 ; 7.671,32.19 16.764,32.19 ; 7.679,55.05 16.688,55.05 ; 7.686,34.73 16.764,34.73 ; 7.696,22.03 16.764,22.03 16.764,24.621 7.696,24.621 ; 7.696,29.65 16.739,29.65 ; 7.696,37.27 16.743,37.27 ; 7.696,42.325 16.764,42.325 ; 7.696,44.89 16.739,44.89 ; 7.696,47.43 16.688,47.43 ; 7.696,49.97 16.739,49.97 ; 7.696,52.536 16.684,52.536 ; 7.696,57.59 16.684,57.59 ; 7.696,60.13 16.688,60.13 ; 7.696,62.67 16.739,62.67 ; 7.696,65.286 16.713,65.286 ; 7.696,67.75 16.688,67.75 ; 12.141,19.499 12.167,19.499 12.167,70.366 ; 113.563,47.54 122.631,47.54 ; 113.563,50.055 122.667,50.055 ; 113.563,55.135 122.641,55.135 ; 113.563,57.675 122.657,57.675 ; 113.563,62.755 122.657,62.755 ; 113.585,52.595 122.631,52.595 ; 113.589,27.195 122.631,27.195 ; 113.589,39.895 122.631,39.895 ; 113.589,44.975 122.631,44.975 ; 113.589,60.215 122.631,60.215 ; 113.614,24.579 122.631,24.579 ; 113.64,22.115 122.631,22.115 ; 113.64,29.735 122.631,29.735 ; 113.64,34.815 122.649,34.815 ; 113.64,42.435 122.631,42.435 ; 113.643,32.275 122.631,32.275 ; 113.643,37.33 122.631,37.33 ; 118.161,19.499 118.161,70.366 118.186,70.366 ; 122.631,65.244 113.563,65.244 113.563,67.835 122.631,67.835
  lines w0.305: 7.696,70.366 7.696,19.49 16.764,19.49 16.764,70.417 7.696,70.417 ; 122.631,19.448 113.563,19.448 113.563,70.375 122.631,70.375 122.631,19.499
  text "【1】" at 117.297,71.272 h2.03
  text "【2】" at 121.742,71.231 h2.03
  text "3V3" at 16.434,68.453 h2.03
  text "GND" at 117.704,68.445 h2.03
  text "3V3" at 11.887,68.402 h2.03
  text "VCC" at 122.301,68.375 h2.03
  text "B1" at 117.704,65.888 h2.03
  text "C2" at 122.301,65.888 h2.03
  text "GND" at 11.887,65.837 h2.03
  text "GND" at 16.434,65.837 h2.03
  text "N2" at 11.887,63.348 h2.03
  text "A2" at 122.301,63.348 h2.03
  text "B3" at 117.704,63.322 h2.03
  text "P1" at 16.434,63.271 h2.03
  text "B4" at 117.704,60.884 h2.03
  text "A3" at 122.301,60.833 h2.03
  text "P2" at 11.887,60.757 h2.03
  text "R1" at 16.434,60.757 h2.03
  text "K9" at 16.434,58.268 h2.03
  text "A4" at 122.301,58.242 h2.03
  text "P8" at 11.887,58.217 h2.03
  text "B5" at 117.704,58.217 h2.03
  text "B6" at 117.704,55.77 h2.03
  text "A5" at 122.301,55.694 h2.03
  text "L9" at 11.887,55.651 h2.03
  text "L10" at 16.434,55.651 h2.03
  text "B7" at 117.704,53.213 h2.03
  text "T2" at 16.434,53.162 h2.03
  text "A6" at 122.301,53.179 h2.03
  text "M9" at 11.887,53.137 h2.03
  text "B8" at 117.704,50.673 h2.03
  text "P3" at 11.887,50.622 h2.03
  text "A7" at 122.301,50.614 h2.03
  text "T3" at 16.434,50.571 h2.03
  text "B9" at 117.704,48.133 h2.03
  text "R3" at 11.887,48.108 h2.03
  text "A8" at 122.301,48.082 h2.03
  text "T4" at 16.434,48.057 h2.03
  text "A9" at 122.301,45.568 h2.03
  text "B10" at 117.704,45.542 h2.03
  text "R4" at 11.887,45.517 h2.03
  text "T5" at 16.434,45.517 h2.03
  text "B11" at 117.704,43.053 h2.03
  text "A10" at 122.301,43.028 h2.03
  text "R5" at 11.887,42.977 h2.03
  text "T6" at 16.434,42.977 h2.03
  text "A11" at 122.301,40.538 h2.03
  text "B12" at 117.704,40.462 h2.03
  text "R6" at 11.887,40.44 h2.03
  text "T7" at 16.434,40.44 h2.03
  text "B13" at 117.704,37.973 h2.03
  text "T8" at 16.434,37.948 h2.03
  text "A12" at 122.301,37.948 h2.03
  text "R7" at 11.887,37.897 h2.03
  text "D5" at 117.704,35.458 h2.03
  text "A13" at 122.301,35.408 h2.03
  text "R8" at 11.887,35.352 h2.03
  text "T9" at 16.434,35.331 h2.03
  text "C6" at 117.704,32.868 h2.03
  text "D6" at 122.301,32.842 h2.03
  text "R9" at 11.887,32.817 h2.03
  text "T10" at 16.434,32.715 h2.03
  text "F8" at 117.704,30.378 h2.03
  text "E7" at 122.301,30.302 h2.03
  text "R10" at 11.887,30.277 h2.03
  text "T11" at 16.434,30.277 h2.03
  text "D8" at 117.704,27.838 h2.03
  text "C8" at 122.301,27.762 h2.03
  text "R11" at 11.887,27.686 h2.03
  text "T12" at 16.434,27.686 h2.03
  text "T13" at 16.434,25.248 h2.03
  text "E9" at 117.704,25.222 h2.03
  text "E8" at 122.301,25.197 h2.03
  text "R12" at 11.887,25.171 h2.03
  text "R13" at 11.887,22.682 h2.03
  text "T14" at 16.434,22.657 h2.03
  text "GND" at 117.704,22.623 h2.03
  text "GND" at 122.301,22.623 h2.03
  text "VCC" at 11.887,20.142 h2.03
  text "GND" at 16.434,20.142 h2.03
  text "3V3" at 117.704,20.134 h2.03
  text "3V3" at 122.301,20.083 h2.03
  text "【2】" at 11.43,17.297 h2.03
  text "【1】" at 15.977,17.221 h2.03
Top Solder:
  drawing of 2495 lines, arcs and shapes, not listed
Mechanical 4:
  circle w0.254: c125.936,4.064 r1.631
  circle w0.254: c125.936,86.055 r1.646
  circle w0.254: c4.064,86.055 r1.654
  circle w0.254: c4.064,4.064 r1.636
  lines w0.203: 0,86.919 0,80.721 ccw(c0.721,80.721) 0.721,80 9.347,80 9.347,10 0.737,10 ccw(c0.737,9.271) 0.007,9.271 ; 0,86.934 cw(c3.066,86.934) 3.066,90 ; 0.007,3.066 0.007,9.271 ; 0.007,3.081 ccw(c3.073,3.081) 3.073,0.015 ; 0.007,9.22 0.007,9.271 ; 3.066,89.985 24.269,89.985 ; 3.073,0 33.401,0 ccw(c33.401,0.686) 34.087,0.686 34.087,0.711 ; 24.206,89.985 24.269,89.985 ; 33.549,81.304 60.681,81.304 60.681,89.027 60.681,89.34 cw(c61.341,89.34) 61.341,90 126.931,90 cw(c126.931,86.934) 129.997,86.934 ; 33.553,81.304 25.049,81.304 25.049,89.205 ccw(c24.269,89.205) 24.269,89.985 ; 34.093,0.692 34.093,6.502 104.496,6.502 104.496,0.66 ccw(c105.156,0.66) 105.156,0 126.931,0 ; 126.931,0.008 ccw(c126.931,3.074) 129.997,3.074 ; 129.997,3.058 129.997,9.294 130,9.296 ; 129.997,86.919 130,86.919 130,80.739 ; 130,9.34 ccw(c129.34,9.34) 129.34,10 120.523,10 120.523,80 129.261,80 ccw(c129.261,80.739) 130,80.739 ; 130,81.356 130,80.739

## Dimensions
0,3.074 to 130,2.979 on Drill Drawing
3.074,90 to 2.972,0 on Drill Drawing

## Text inside footprints (layer, text, board x,y; h text height)
J5: Top Overlay "2" at 86.563,76.687 h1.52 r180; Top Overlay "1" at 86.436,79.481 h1.52 r180